# Altium PCB ControlPanel.PcbDoc
Units mil, origin at the board's own origin, x right, y up, seen from the top; angles counter-clockwise.
Board outline 6000 x 4000 mil, 2 copper layers (Top Layer, Bottom Layer); 73 components, 95 nets, 219 pads, 0 vias.
Unrouted connection lines stored in the file: 115.
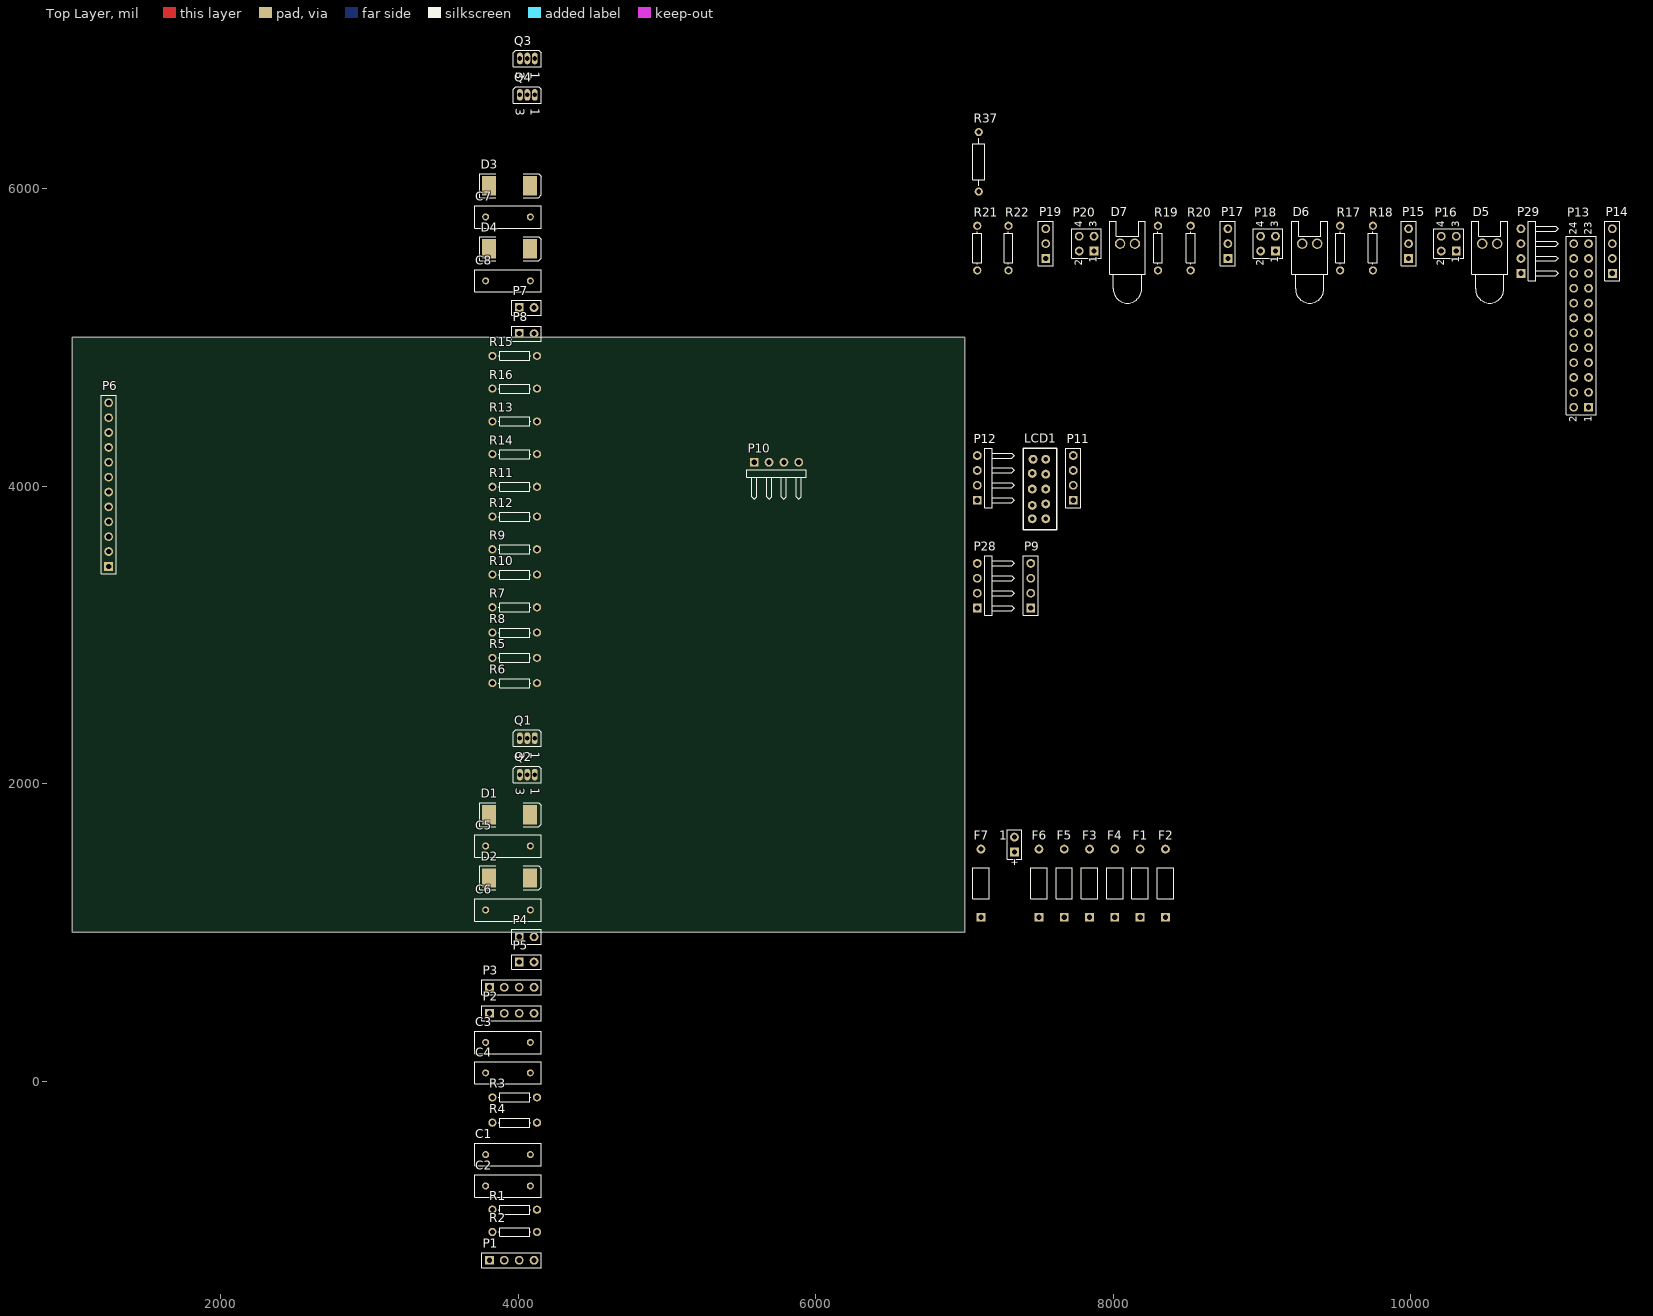
[diagram p0: Top Layer view]
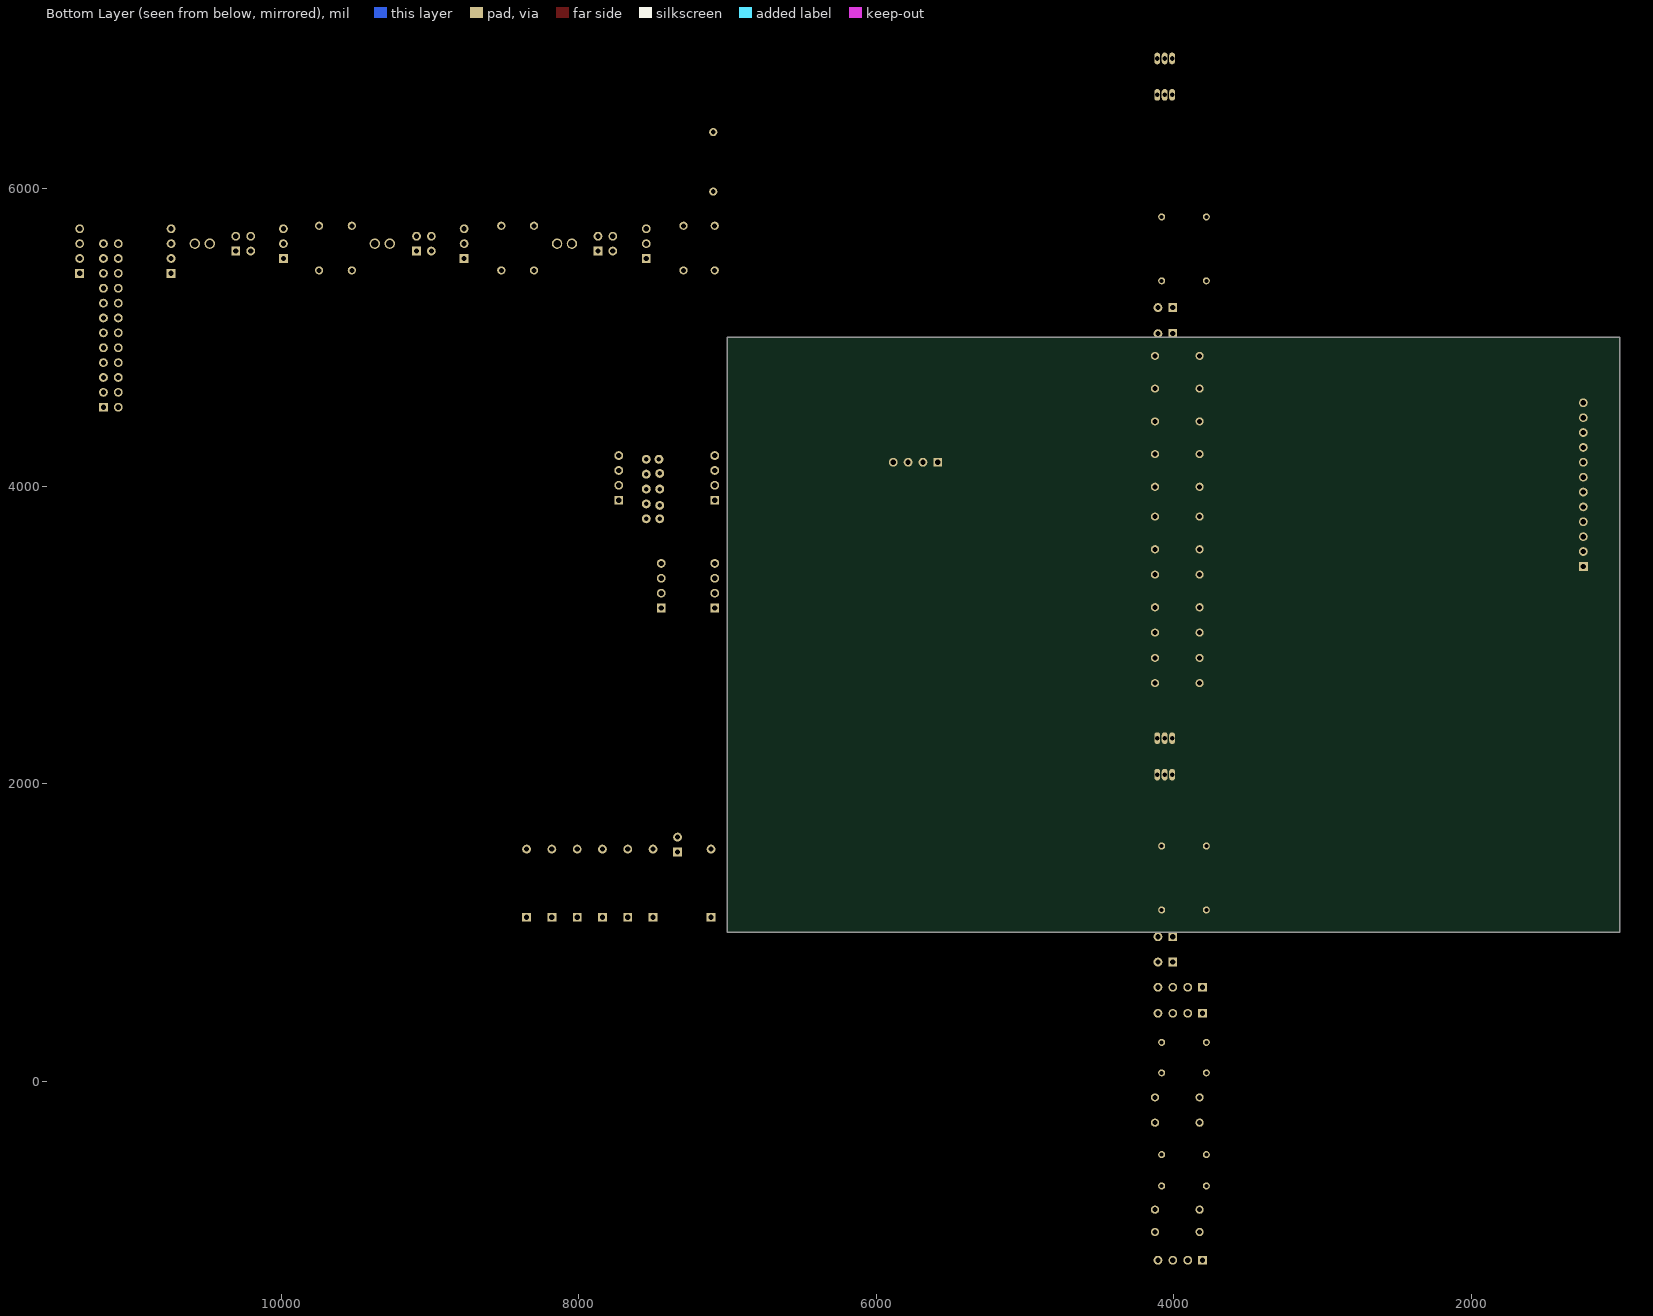
[diagram p1: Bottom Layer view, seen from below]

## Layer stack, top to bottom
Top Solder: solder mask 0.4, Solder Resist, Dk 3.5
Top Layer: signal copper 1.4
Dielectric 1: dielectric 12.6, FR-4, Dk 4.8
Bottom Layer: signal copper 1.4
Bottom Solder: solder mask 0.4, Solder Resist, Dk 3.5

## Board outline
1000,1000 7000,1000 7000,5000 1000,5000

## Design rules (kind name [scope] priority, off if disabled: settings)
Clearance [All] p1: gap=10 ignorepadtopadclearanceinfootprint=FALSE except(0: Arc-Hole Track-Hole SMDPad-Hole THPad-Hole Via-Hole Fill-Hole Poly-Hole Region-Hole Text-Hole)
PolygonConnect [All] p1: connectstyle=Relief reliefconductorwidth=10 reliefentries=4 polygonreliefangle="90 Angle" airgapwidth=10
RoomDefinition TopLevel [InComponentClass('TopLevel')] p1: confinementstyle=ConfineIn formatcopy=TRUE lockcomponents=FALSE outline 7045,5940 7240,5940 7240,6520 7045,6520
RoomDefinition Navigation [InComponentClass('Navigation')] p2: confinementstyle=ConfineIn formatcopy=TRUE lockcomponents=FALSE outline 7045,4415 11480,4415 11480,5890 7045,5890
RoomDefinition MotorController [InComponentClass('MotorController')] p3: confinementstyle=ConfineIn formatcopy=TRUE lockcomponents=FALSE outline 0,0 2000,0 2000,1000 0,1000
RoomDefinition "Control Panel" [InComponentClass('Control Panel')] p4: confinementstyle=ConfineIn formatcopy=TRUE lockcomponents=FALSE outline 7045,3690 7835,3690 7835,4365 7045,4365
RoomDefinition Communication [InComponentClass('Communication')] p5: confinementstyle=ConfineIn formatcopy=TRUE lockcomponents=FALSE outline 7045,3120 7520,3120 7520,3640 7045,3640
RoomDefinition Braking [InComponentClass('Braking')] p6: confinementstyle=ConfineIn formatcopy=TRUE lockcomponents=FALSE outline 2945,8205 2945,0 4265,0 4265,8205
RoomDefinition BMS [InComponentClass('BMS')] p7: confinementstyle=ConfineIn formatcopy=TRUE lockcomponents=FALSE outline 7045,1060 8420,1060 8420,1700 7045,1700
RoutingVias [All] p1: holewidth=28 width=50 viastyle="Through Hole" minholewidth=28 minwidth=50 maxholewidth=28 maxwidth=50
SolderMaskExpansion [All] p1: expansion=4
Width [All] p1: maxlimit=10 minlimit=10 preferedwidth=10
30 further rules are at their usual default settings.

## Classes and differential pairs
component class BMS: 1 B1 B2 B3 B4 B5 B6 B7 B8 B9 B10 B11 B12 B13 B14 B15 B16 B17 B18 B19 B20 B21 B22 B23 B24 BMS1 CS1 F1 F2 F3 F4 F5 F6 F7 S1 S2 S3 S4 S5 S6
component class Braking: BC1 C1 C2 C3 C4 C5 C6 C7 C8 D1 D2 D3 D4 MC1 P1 P2 P3 P4 P5 P6 P7 P8 P10 Q1 Q2 Q3 Q4 R1 R2 R3 R4 R5 R6 R7 R8 R9 R10 R11 R12 R13 R14 R15 R16
component class Communication: BC2 CN11 CN12 P9 P28
component class "Control Panel": BC3 LCD1 P11 P12 STM1
component class MotorController: * *1
component class Navigation: *3 BC4 D5 D6 D7 P13 P14 P15 P16 P17 P18 P19 P20 P29 R17 R18 R19 R20 R21 R22
component class TopLevel: R37

## Components (designator, comment, footprint, x,y, rotation, side; value= is the part's Value field where it differs from the comment)
1 "Battery" BAT-2 7335,1590 r90 top
C1 "Cap" RAD-0.3 3930,-495 r0 top value=100pF
C2 "Cap" RAD-0.3 3930,-705 r0 top value=100pF
C3 "Cap" RAD-0.3 3930,260 r0 top value=100pF
C4 "Cap" RAD-0.3 3930,55 r0 top value=100pF
C5 "Cap" RAD-0.3 3930,1580 r0 top value=100pF
C6 "Cap" RAD-0.3 3930,1150 r0 top value=100pF
C7 "Cap" RAD-0.3 3930,5810 r0 top value=100pF
C8 "Cap" RAD-0.3 3930,5380 r0 top value=100pF
D1 "Diode" SMC 3940,1790 r0 top
D2 "Diode" SMC 3940,1365 r0 top
D3 "Diode" SMC 3940,6020 r0 top
D4 "Diode" SMC 3940,5595 r0 top
D5 "LED0" LED-0 10530,5630 r0 top
D6 "LED0" LED-0 9320,5630 r0 top
D7 "LED0" LED-0 8095,5630 r0 top
F1 "Fuse 2" PIN-W2/E2.8 8180,1330 r90 top
F2 "Fuse 2" PIN-W2/E2.8 8350,1330 r90 top
F3 "Fuse 2" PIN-W2/E2.8 7840,1330 r90 top
F4 "Fuse 2" PIN-W2/E2.8 8010,1330 r90 top
F5 "Fuse 2" PIN-W2/E2.8 7670,1330 r90 top
F6 "Fuse 2" PIN-W2/E2.8 7500,1330 r90 top
F7 "Fuse 2" PIN-W2/E2.8 7110,1330 r90 top
LCD1 "LCD Pin" "LCD Display Header" 7545,3780 r90 top
P1 "Power" HDR1X4 3805,-1205 r0 top
P2 "Prox Sensors" HDR1X4 3805,455 r0 top
P3 "Limit Switches" HDR1X4 3805,630 r0 top
P4 "Header 2" HDR1X2 4005,970 r0 top
P5 "Header 2" HDR1X2 4005,800 r0 top
P6 "Pressure Sensor" HDR1X12 1245,3460 r90 top
P7 "Header 2" HDR1X2 4005,5200 r0 top
P8 "Header 2" HDR1X2 4005,5025 r0 top
P9 "Power" HDR1X4 7445,3180 r90 top
P10 "Header 4H" HDR1X4H 5585,4160 r0 top
P11 "Power" HDR1X4 7730,3905 r90 top
P12 "Header 4H" HDR1X4H 7085,3905 r90 top
P13 "Header 12X2" HDR2X12 11195,4530 r90 top
P14 "Power" HDR1X4 11355,5430 r90 top
P15 "Header 3" HDR1X3 9985,5530 r90 top
P16 "Header 2X2" HDR2X2 10305,5580 r90 top
P17 "Header 3" HDR1X3 8770,5530 r90 top
P18 "Header 2X2" HDR2X2 9090,5580 r90 top
P19 "Header 3" HDR1X3 7545,5530 r90 top
P20 "Header 2X2" HDR2X2 7870,5580 r90 top
P28 "Header 4H" HDR1X4H 7085,3180 r90 top
P29 "Header 4H" HDR1X4H 10740,5430 r90 top
Q1 "MOSFET-N" E3 4060,2305 r270 top
Q2 "MOSFET-N" E3 4060,2060 r270 top
Q3 "MOSFET-N" E3 4060,6875 r270 top
Q4 "MOSFET-N" E3 4060,6630 r270 top
R1 "Res1" AXIAL-0.3 3975,-865 r0 top value=1K
R2 "Res1" AXIAL-0.3 3975,-1015 r0 top value=1K
R3 "Res1" AXIAL-0.3 3975,-110 r0 top value=1K
R4 "Res1" AXIAL-0.3 3975,-280 r0 top value=1K
R5 "Res1" AXIAL-0.3 3975,2845 r0 top value=2.2K
R6 "Res1" AXIAL-0.3 3975,2675 r0 top value=1K
R7 "Res1" AXIAL-0.3 3975,3185 r0 top value=2.2K
R8 "Res1" AXIAL-0.3 3975,3015 r0 top value=1K
R9 "Res1" AXIAL-0.3 3975,3575 r0 top value=2.2K
R10 "Res1" AXIAL-0.3 3975,3405 r0 top value=1K
R11 "Res1" AXIAL-0.3 3975,3995 r0 top value=2.2K
R12 "Res1" AXIAL-0.3 3975,3795 r0 top value=1K
R13 "Res1" AXIAL-0.3 3975,4435 r0 top value=2.2K
R14 "Res1" AXIAL-0.3 3975,4215 r0 top value=1K
R15 "Res1" AXIAL-0.3 3975,4875 r0 top value=2.2K
R16 "Res1" AXIAL-0.3 3975,4655 r0 top value=1K
R17 "Res1" AXIAL-0.3 9525,5600 r90 top value=1K
R18 "Res1" AXIAL-0.3 9745,5600 r90 top value=1K
R19 "Res1" AXIAL-0.3 8300,5600 r90 top value=1K
R20 "Res1" AXIAL-0.3 8520,5600 r90 top value=1K
R21 "Res1" AXIAL-0.3 7085,5600 r90 top value=1K
R22 "Res1" AXIAL-0.3 7295,5600 r90 top value=1K
R37 "Res2" AXIAL-0.4 7095,6180 r90 top value=120

## Footprints (in the part's own frame and the unit in brackets; to place one, negate y for a bottom-side part, rotate by r counter-clockwise, add the part's x,y. Pads: shape width x height; smd on the part's side, far side on the other; paste and mask are expansions set on the pad)
AXIAL-0.3 [mm] "Axial Device, Thru-Hole; 2 Leads; 0.3 in Pin Spacing"
  round 1.4 hole 0.85: 1(-3.81,0) 2(3.81,0)
  silkscreen extent -2.77,-0.76 2.77,0.76
AXIAL-0.4 [mm] "Axial Device, Thru-Hole; 2 Leads; 0.4 in Pin Spacing"
  round 1.4 hole 0.85: 1(-5.08,0) 2(5.08,0)
  silkscreen extent -4.06,-1.02 4.06,1.02
BAT-2 [mm] "Battery; 2 Leads"
  rect 1.5x1.5 hole 0.9: 1(-1.27,0)
  round 1.5 hole 0.9: 2(1.27,0)
  silkscreen extent -2.54,-1.27 2.54,1.27
E3 [mm] "TO, Flat Index; 3 In-Line, Axial Leads; Body Dia. 4.6mm; Lead Dia. 0.5 mm (max)"
  oval 2x1 hole 0.8: 1(0,1.27) 2(0,0) 3(0,-1.27)
  silkscreen extent -1.41,-2.41 1.41,2.41
HDR1X2 [mm] "Connector; Header; 2 Position"
  rect 1.5x1.5 hole 0.9: 1(0,0)
  round 1.5 hole 0.9: 2(2.54,0)
  silkscreen extent -1.27,-1.27 3.81,1.27
HDR1X3 [mm] "Connector; Header; 3 Position"
  rect 1.5x1.5 hole 0.9: 1(0,0)
  round 1.5 hole 0.9: 2(2.54,0) 3(5.08,0)
  silkscreen extent -1.27,-1.27 6.35,1.27
HDR1X4 [mm] "Connector; Header; 4 Position"
  rect 1.5x1.5 hole 0.9: 1(0,0)
  round 1.5 hole 0.9: 2(2.54,0) 3(5.08,0) 4(7.62,0)
  silkscreen extent -1.27,-1.27 8.89,1.27
HDR1X4H [mm] "Connector; Header; 4 Position; Right Angle"
  rect 1.5x1.5 hole 0.9: 1(0,0)
  round 1.5 hole 0.9: 2(2.54,0) 3(5.08,0) 4(7.62,0)
  silkscreen extent -1.27,-6.35 8.89,-1.27
HDR1X12 [mm] "Connector; Header; 12 Position"
  rect 1.5x1.5 hole 0.9: 1(0,0)
  round 1.5 hole 0.9: 2(2.54,0) 3(5.08,0) 4(7.62,0) 5(10.16,0) 6(12.7,0) 7(15.24,0) 8(17.78,0) 9(20.32,0) 10(22.86,0) 11(25.4,0) 12(27.94,0)
  silkscreen extent -1.27,-1.27 29.21,1.27
HDR2X2 [mm] "Connector; Header; 2x2 Position"
  rect 1.5x1.5 hole 0.9: 1(0,0)
  round 1.5 hole 0.9: 2(0,2.54) 3(2.54,0) 4(2.54,2.54)
  silkscreen extent -1.27,-1.27 3.81,3.81
HDR2X12 [mm] "Connector; Header; 12x2 Position"
  rect 1.5x1.5 hole 0.9: 1(0,0)
  round 1.5 hole 0.9: 2(0,2.54) 3(2.54,0) 4(2.54,2.54) 5(5.08,0) 6(5.08,2.54) 7(7.62,0) 8(7.62,2.54) 9(10.16,0) 10(10.16,2.54) 11(12.7,0) 12(12.7,2.54) 13(15.24,0) 14(15.24,2.54) 15(17.78,0) 16(17.78,2.54) 17(20.32,0) 18(20.32,2.54) 19(22.86,0) 20(22.86,2.54) 21(25.4,0) 22(25.4,2.54) 23(27.94,0) 24(27.94,2.54)
  silkscreen extent -1.27,-1.27 29.21,3.81
"LCD Display Header" [mil]
  round 60 hole 30: 1(0,0) 2(100,0) 3(200,0) 4(300,0) 5(400,0) 6(0,90) 7(90,90) 8(200,90) 9(305,90) 10(400,85)
  silkscreen extent -75,-75 475,150
LED-0 [mil] "LED; 2 Leads"
  round 70 hole 50: 1(50,0) 2(-50,0)
  silkscreen extent -120,-400 120,150
PIN-W2/E2.8 [mm] "Thru-Hole; 2 Leads"
  rect 1.5x1.5 hole 0.9: 1(-5.825,0)
  round 1.5 hole 0.9: 2(5.825,0)
  silkscreen extent -2.65,-1.4 2.65,1.4
RAD-0.3 [mm] "Radial Cap, Thru-Hole; 2 Leads; 0.3 in Pin Spacing"
  round 1.2 hole 0.7: 1(-3.81,0) 2(3.81,0)
  silkscreen extent -5.71,-1.91 5.71,1.91
SMC [mm] "DO-214-AB/SMC; 2 C-Bend Leads; Body 7.9 x 5.9 mm, inc. leads (LxW)"
  rect 2.4x3.3 smd: 1(-3.475,0) 2(3.475,0)
  silkscreen extent -5.07,-2.05 5.43,2.05

## Part data
1: "Multicell Battery", LatestRevisionDate=17-Jul-2002, LatestRevisionNote="Re-released for DXP Platform.", PackageDescription="Battery; 2 Leads", PackageReference=BAT-2, Published=24-Mar-1999, Publisher="Altium Limited"
C1 C2 C3 C4 C5 C6 C7 C8: "Capacitor", LatestRevisionDate=17-Jul-2002, LatestRevisionNote="Re-released for DXP Platform.", PackageDescription="Radial Cap, Thru-Hole; 2 Leads; 0.3 in Pin Spacing", PackageReference=RAD-0.3, Published=8-Jun-2000, Publisher="Altium Limited"
D1 D2 D3 D4: "Default Diode", Code_JEDEC=DO-214-AB, LatestRevisionDate=17-Jul-2002, LatestRevisionNote="Re-released for DXP Platform.", PackageDescription="DO-214-AB/SMC; 2 C-Bend Leads; Body 7.9 x 5.9 mm, inc. leads (LxW)", PackageReference=SMC, PackageVersion=Sep-1996, Published=8-Jun-2000, Publisher="Altium Limited"
D5 D6 D7: "Typical INFRARED GaAs LED", LatestRevisionDate=08-Jul-2005, LatestRevisionNote="Mech Layer 1 removed.", PackageDescription="LED; 2 Leads", PackageReference=LED-0, Published=8-Jun-2000, Publisher="Altium Limited"
F1 F2 F3 F4 F5 F6 F7: "Fuse", LatestRevisionDate=17-Jul-2002, LatestRevisionNote="Re-released for DXP Platform.", PackageDescription="Thru-Hole; 2 Leads", PackageReference=PIN-W2/E2.8, Published=8-Jun-2000, Publisher="Altium Limited"
P1 P2 P3 P9 P11 P14: library part "Header 4", "Header, 4-Pin", LatestRevisionDate=17-Jul-2002, LatestRevisionNote="Re-released for DXP Platform.", Publisher="Altium Limited"
P4 P5 P7 P8: "Header, 2-Pin", LatestRevisionDate=17-Jul-2002, LatestRevisionNote="Re-released for DXP Platform.", Publisher="Altium Limited"
P6: library part "Header 12", "Header, 12-Pin", LatestRevisionDate=17-Jul-2002, LatestRevisionNote="Re-released for DXP Platform.", Publisher="Altium Limited"
P10 P12 P28 P29: "Header, 4-Pin, Right Angle", LatestRevisionDate=17-Jul-2002, LatestRevisionNote="Re-released for DXP Platform.", Publisher="Altium Limited"
P13: "Header, 12-Pin, Dual row", LatestRevisionDate=17-Jul-2002, LatestRevisionNote="Re-released for DXP Platform.", Publisher="Altium Limited"
P15 P17 P19: "Header, 3-Pin", LatestRevisionDate=17-Jul-2002, LatestRevisionNote="Re-released for DXP Platform.", Publisher="Altium Limited"
P16 P18 P20: "Header, 2-Pin, Dual row", LatestRevisionDate=17-Jul-2002, LatestRevisionNote="Re-released for DXP Platform.", Publisher="Altium Limited"
Q1 Q2 Q3 Q4: "N-Channel MOSFET", LatestRevisionDate=17-Jul-2002, LatestRevisionNote="Re-released for DXP Platform.", PackageDescription="TO, Flat Index; 3 In-Line, Axial Leads; Body Dia. 4.6mm; Lead Dia. 0.5 mm (max)", PackageReference=E3, PackageVersion=1995/1996, Published=8-Jun-2000, Publisher="Altium Limited"
R1 R2 R3 R4 R5 R6 R7 R8 R9 R10 R11 R12 R13 R14 R15 R16 R17 R18 R19 R20 R21 R22 R37: "Resistor", LatestRevisionDate=17-Jul-2002, LatestRevisionNote="Re-released for DXP Platform.", Published=8-Jun-2000, Publisher="Altium Limited"
  R1 R2 R3 R4 R5 R6 R7 R8 R9 R10 R11 R12 R13 R14 R15 R16 R17 R18 R19 R20 R21 R22: PackageDescription="Axial Device, Thru-Hole; 2 Leads; 0.3 in Pin Spacing", PackageReference=AXIAL-0.3
  R37: PackageDescription="Axial Device, Thru-Hole; 2 Leads; 0.4 in Pin Spacing", PackageReference=AXIAL-0.4

## Nets (pads, with @x,y where several pads share a name; then routed paths per layer and width w, separated by ;. In a path a pad name is that pad's centre, name@x,y a point inside that pad or via, vN(x,y) a via of type N, cw(c..) or ccw(c..) an arc to the next point about the centre after c; other vN are vias at no path point)
3.3V: LCD1.9
3V3: C1.2 C2.2 C3.2 C4.2 R1.1 R2.2 R3.1 R4.2 R18.2 R20.2 R22.2
5V+(encoder): 
9V: 
12V: P1.2
24V+: C5.1 C6.1 C7.1 C8.1 D1.2 D2.2 D3.2 D4.2 P1.1 P4.1 P5.1 P6.2 P6.4 P6.6 P6.8 P6.10 P6.12 P7.1 P8.1 P14.1 P15.3 P17.3 P19.3 R17.1 R19.1 R21.1
88V: 
176V: 
Analog1: R5.2 R6.1
Analog2: R7.2 R8.1
Analog3: R9.2 R10.1
Analog4: R11.2 R12.1
Analog5: R13.2 R14.1
Analog6: R15.2 R16.1
CAN2_H: 
CAN2_L: 
CAN_HI: P10.1
CAN_LO: P10.2
"Charge Power": 
"Charger Safety": 
CLK+(Encoder): 
CLK-(Encoder): 
D1: Q1.2
D2: Q2.2
D3: Q3.2
D4: Q4.2
Data+(encoder): 
Data-(encoder): 
GND: 1.2 C1.1 C2.1 C3.1 C4.1 LCD1.1 LCD1.8 P1.4 P2.1 P2.4 P3.1 P3.4 P9.4 P10.3 P10.4 P11.4 P12.3 P12.4 P14.4 P15.1 P16.4 P17.1 P18.4 P19.1 P20.4 P28.3 P28.4 P29.3 P29.4 Q1.3 Q2.3 Q3.3 Q4.3 R5.1 R7.1 R9.1 R11.1 R13.1 R15.1
GND(encoder): 
HV+: 
HV-: 
Limit1: P3.3 R3.2
Limit2: P3.2 R4.1
Limit3: P2.3 R1.2
Limit4: P2.2 R2.1
Net1_1: 1.1 F6.2 F7.2
NetB1_6: 
NetB2_6: 
NetB3_6: 
NetB4_6: F1.1
NetB5_5: 
NetB5_6: 
NetB6_6: 
NetB7_6: 
NetB8_6: F2.1
NetB9_6: 
NetB10_6: 
NetB11_6: 
NetB12_6: F3.1
NetB13_5: 
NetB13_6: 
NetB14_6: 
NetB15_6: 
NetB16_6: F4.1
NetB17_6: 
NetB18_6: 
NetB19_6: 
NetB20_6: F5.1
NetB21_5: 
NetB21_6: 
NetB22_6: 
NetB23_6: 
NetB24_6: 
NetBMS1_1: 
NetBMS1_2: F6.1
NetC5_2: C5.2 D1.1 P4.2 Q1.1
NetC6_2: C6.2 D2.1 P5.2 Q2.1
NetC7_2: C7.2 D3.1 P7.2 Q3.1
NetC8_2: C8.2 D4.1 P8.2 Q4.1
NetD5_1: D5.1 R18.1
NetD6_1: D6.1 R20.1
NetD7_1: D7.1 R22.1
NetF1_2: F1.2
NetF2_2: F2.2
NetF3_2: F3.2
NetF4_2: F4.2
NetF5_2: F5.2
NetF7_1: F7.1
NetLabel61: D5.2 P16.2
NetLabel62: D6.2 P18.2
NetLabel63: D7.2 P20.2
NetP6_1: P6.1 R6.2
NetP6_3: P6.3 R8.2
NetP6_5: P6.5 R10.2
NetP6_7: P6.7 R12.2
NetP6_9: P6.9 R14.2
NetP6_11: P6.11 R16.2
NetP15_2: P15.2 P16.3
NetP16_1: P16.1 R17.2
NetP17_2: P17.2 P18.3
NetP18_1: P18.1 R19.2
NetP19_2: P19.2 P20.3
NetP20_1: P20.1 R21.2
"State of Charge": 
pads on no net: LCD1.2 LCD1.3 LCD1.4 LCD1.5 LCD1.6 LCD1.7 LCD1.10 P1.3 P9.1 P9.2 P9.3 P11.1 P11.2 P11.3 P12.1 P12.2 P13.1 P13.2 P13.3 P13.4 P13.5 P13.6 P13.7 P13.8 P13.9 P13.10 P13.11 P13.12 P13.13 P13.14 P13.15 P13.16 P13.17 P13.18 P13.19 P13.20 P13.21 P13.22 P13.23 P13.24 P14.2 P14.3 P28.1 P28.2 P29.1 P29.2 R37.1 R37.2

## Text inside footprints (layer, text, board x,y; h text height)
1: Top Overlay "+" at 7357.72,1445.51 h45.28 r90
P13: Top Overlay "24" at 11115,5690 h50 r90; Top Overlay "23" at 11215,5690 h50 r90; Top Overlay "2" at 11115,4430 h50 r90; Top Overlay "1" at 11215,4430 h50 r90
P16: Top Overlay "3" at 10325,5740 h50 r90; Top Overlay "4" at 10225,5740 h50 r90; Top Overlay "2" at 10225,5480 h50 r90; Top Overlay "1" at 10325,5500 h50 r90
P18: Top Overlay "3" at 9110,5740 h50 r90; Top Overlay "4" at 9010,5740 h50 r90; Top Overlay "2" at 9010,5480 h50 r90; Top Overlay "1" at 9110,5500 h50 r90
P20: Top Overlay "3" at 7890,5740 h50 r90; Top Overlay "4" at 7790,5740 h50 r90; Top Overlay "2" at 7790,5480 h50 r90; Top Overlay "1" at 7890,5500 h50 r90
Q1: Top Overlay "3" at 3982.72,2215.43 h59.05 r270; Top Overlay "1" at 4081.85,2215.43 h59.05 r270
Q2: Top Overlay "3" at 3982.72,1970.43 h59.05 r270; Top Overlay "1" at 4081.85,1970.43 h59.05 r270
Q3: Top Overlay "3" at 3982.72,6785.43 h59.05 r270; Top Overlay "1" at 4081.85,6785.43 h59.05 r270
Q4: Top Overlay "3" at 3982.72,6540.43 h59.05 r270; Top Overlay "1" at 4081.85,6540.43 h59.05 r270